# Altium PCB Main_Board.PcbDoc (part 2 of 14)
Units mm, origin at the board's own origin, x right, y up, seen from the top; angles counter-clockwise.
Board outline 142 x 82 mm, 10 copper layers (L1_Top, L2_PWR1, L3_Sig1, L4_GND1, L5_Sig2, L6_Sig3, L7_GND2, L8_Sig4, L9_GND3, L8_Bottom), stack 1.71 mm thick; 299 components, 328 nets, 2329 pads, 2908 vias.
Unrouted connection lines stored in the file: 2.
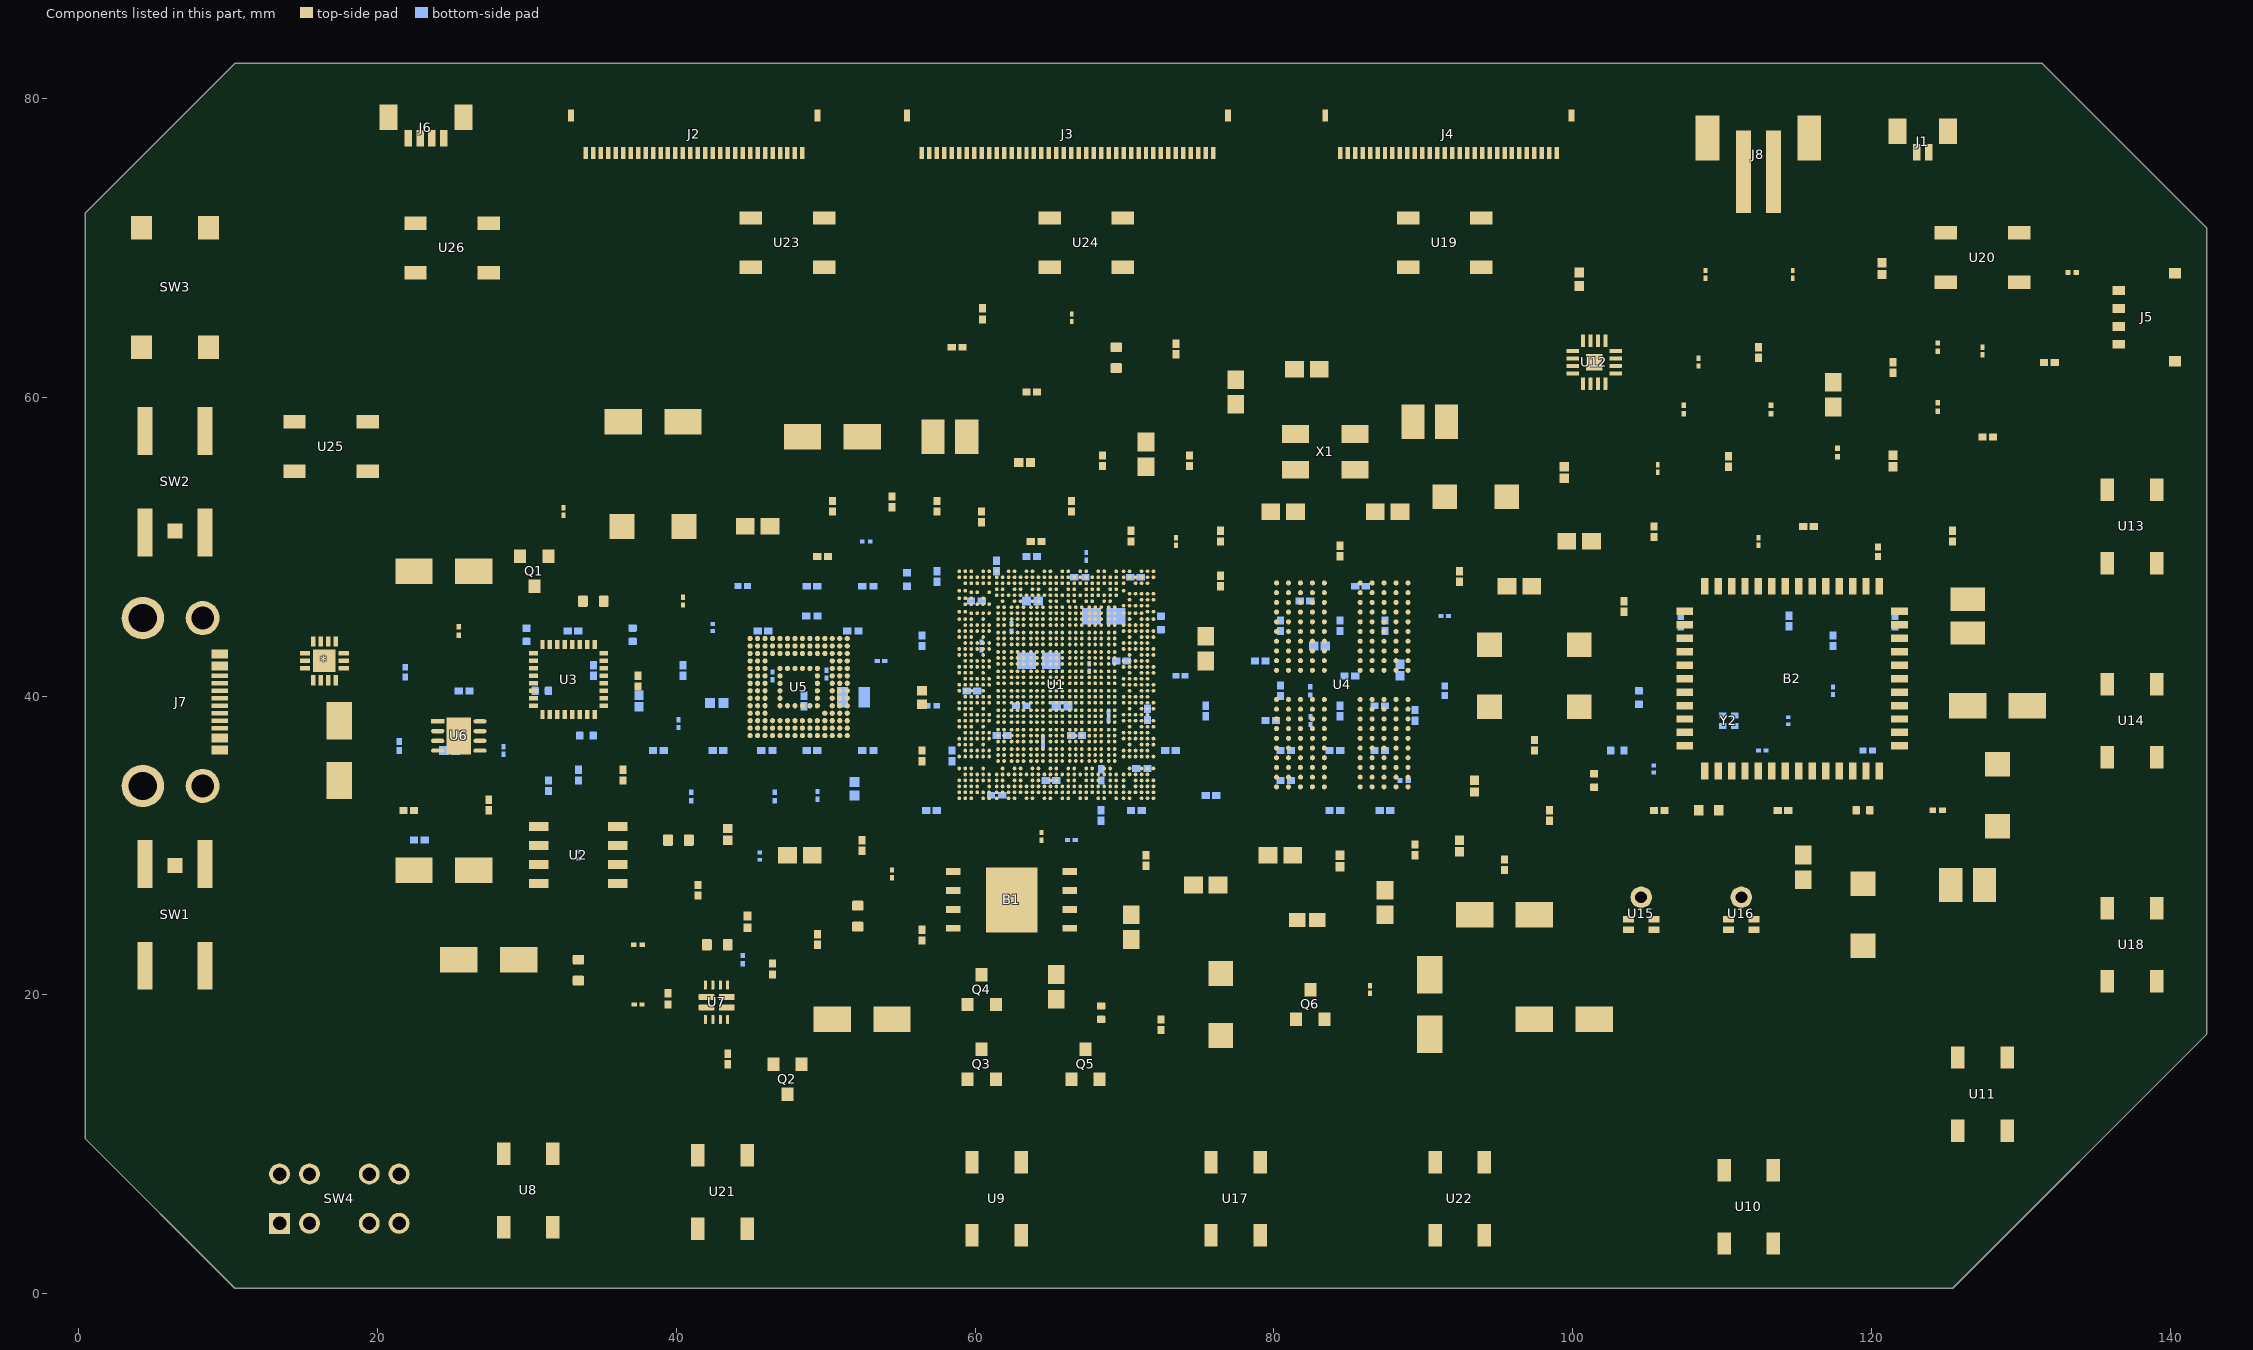
[diagram p10: the components of this part, seen from the top]

## Design rules (kind name [scope] priority, off if disabled: settings) (continued)
Clearance Clearance_1 [InNetClass('MIPI_HIGH_SPEED') And (ExistsOnLayer('L3_Sig1') Or ExistsOnLayer('L5_Sig2') Or ExistsOnLayer('L6_Sig3') Or ExistsOnLayer('L8_Sig4')) vs InNetClass('MCU_SIGNAL') And (ExistsOnLayer('L3_Sig1') Or ExistsOnLayer('L5_Sig2') Or ExistsOnLayer('L6_Sig3') Or ExistsOnLayer('L8_Sig4'))] p128: gap=0.02 ignorepadtopadclearanceinfootprint=FALSE except(0.254: Hole-Hole) sourcerule=512 cellrowname=MIPI_HIGH_SPEED cellrowtype=2 cellcolname=MCU_SIGNAL cellcoltype=2 innerlayers=TRUE
Clearance Clearance_2 [InNetClass('MIPI_HIGH_SPEED') And (ExistsOnLayer('L1_Top') Or ExistsOnLayer('L8_Bottom')) vs InNetClass('MCU_SIGNAL') And (ExistsOnLayer('L1_Top') Or ExistsOnLayer('L8_Bottom'))] p129: gap=0.02 ignorepadtopadclearanceinfootprint=FALSE except(0.254: Hole-Hole) sourcerule=512 cellrowname=MIPI_HIGH_SPEED cellrowtype=2 cellcolname=MCU_SIGNAL cellcoltype=2 outerlayers=TRUE
Clearance Clearance_3 [InNetClass('MIPI_HIGH_SPEED') vs InNetClass('MCU_SIGNAL')] p130: gap=0.254 ignorepadtopadclearanceinfootprint=FALSE sourcerule=512 cellrowname=MIPI_HIGH_SPEED cellrowtype=2 cellcolname=MCU_SIGNAL cellcoltype=2
Clearance Clearance_1 [InNetClass('MIPI_HIGH_SPEED') And (ExistsOnLayer('L3_Sig1') Or ExistsOnLayer('L5_Sig2') Or ExistsOnLayer('L6_Sig3') Or ExistsOnLayer('L8_Sig4')) vs InNetClass('MIPI_HIGH_SPEED') And (ExistsOnLayer('L3_Sig1') Or ExistsOnLayer('L5_Sig2') Or ExistsOnLayer('L6_Sig3') Or ExistsOnLayer('L8_Sig4'))] p131: gap=0.02 ignorepadtopadclearanceinfootprint=FALSE except(0.254: Hole-Hole) sourcerule=512 cellrowname=MIPI_HIGH_SPEED cellrowtype=2 cellcolname=MIPI_HIGH_SPEED cellcoltype=2 innerlayers=TRUE
Clearance Clearance_2 [InNetClass('MIPI_HIGH_SPEED') And (ExistsOnLayer('L1_Top') Or ExistsOnLayer('L8_Bottom')) vs InNetClass('MIPI_HIGH_SPEED') And (ExistsOnLayer('L1_Top') Or ExistsOnLayer('L8_Bottom'))] p132: gap=0.02 ignorepadtopadclearanceinfootprint=FALSE except(0.254: Hole-Hole) sourcerule=512 cellrowname=MIPI_HIGH_SPEED cellrowtype=2 cellcolname=MIPI_HIGH_SPEED cellcoltype=2 outerlayers=TRUE
Clearance Clearance_3 [InNetClass('MIPI_HIGH_SPEED') vs InNetClass('MIPI_HIGH_SPEED')] p133: gap=0.254 ignorepadtopadclearanceinfootprint=FALSE sourcerule=512 cellrowname=MIPI_HIGH_SPEED cellrowtype=2 cellcolname=MIPI_HIGH_SPEED cellcoltype=2
Clearance Clearance_1 [InNetClass('PERIPHERICS_SIGNALS') And (ExistsOnLayer('L3_Sig1') Or ExistsOnLayer('L5_Sig2') Or ExistsOnLayer('L6_Sig3') Or ExistsOnLayer('L8_Sig4')) vs InNetClass('ANTENAS') And (ExistsOnLayer('L3_Sig1') Or ExistsOnLayer('L5_Sig2') Or ExistsOnLayer('L6_Sig3') Or ExistsOnLayer('L8_Sig4'))] p134: gap=0.02 ignorepadtopadclearanceinfootprint=FALSE except(0.05: Hole-Hole) sourcerule=512 cellrowname=PERIPHERICS_SIGNALS cellrowtype=2 cellcolname=ANTENAS cellcoltype=2 innerlayers=TRUE
Clearance Clearance_2 [InNetClass('PERIPHERICS_SIGNALS') And (ExistsOnLayer('L1_Top') Or ExistsOnLayer('L8_Bottom')) vs InNetClass('ANTENAS') And (ExistsOnLayer('L1_Top') Or ExistsOnLayer('L8_Bottom'))] p135: gap=0.02 ignorepadtopadclearanceinfootprint=FALSE except(0.05: Hole-Hole) sourcerule=512 cellrowname=PERIPHERICS_SIGNALS cellrowtype=2 cellcolname=ANTENAS cellcoltype=2 outerlayers=TRUE
Clearance Clearance_3 [InNetClass('PERIPHERICS_SIGNALS') vs InNetClass('ANTENAS')] p136: gap=0.254 ignorepadtopadclearanceinfootprint=FALSE sourcerule=512 cellrowname=PERIPHERICS_SIGNALS cellrowtype=2 cellcolname=ANTENAS cellcoltype=2
Clearance Clearance_1 [InNetClass('PERIPHERICS_SIGNALS') And (ExistsOnLayer('L3_Sig1') Or ExistsOnLayer('L5_Sig2') Or ExistsOnLayer('L6_Sig3') Or ExistsOnLayer('L8_Sig4')) vs (ExistsOnLayer('L3_Sig1') Or ExistsOnLayer('L5_Sig2') Or ExistsOnLayer('L6_Sig3') Or ExistsOnLayer('L8_Sig4'))] p137: gap=0.02 ignorepadtopadclearanceinfootprint=FALSE except(0.254: Hole-Hole) sourcerule=512 cellrowname=PERIPHERICS_SIGNALS cellrowtype=2 cellcolname=All cellcoltype=0 innerlayers=TRUE
Clearance Clearance_2 [InNetClass('PERIPHERICS_SIGNALS') And (ExistsOnLayer('L1_Top') Or ExistsOnLayer('L8_Bottom')) vs (ExistsOnLayer('L1_Top') Or ExistsOnLayer('L8_Bottom'))] p138: gap=0.02 ignorepadtopadclearanceinfootprint=FALSE except(0.254: Hole-Hole) sourcerule=512 cellrowname=PERIPHERICS_SIGNALS cellrowtype=2 cellcolname=All cellcoltype=0 outerlayers=TRUE
Clearance Clearance_3 [InNetClass('PERIPHERICS_SIGNALS')] p139: gap=0.254 ignorepadtopadclearanceinfootprint=FALSE sourcerule=512 cellrowname=PERIPHERICS_SIGNALS cellrowtype=2 cellcolname=All cellcoltype=0
Clearance Clearance_1 [InNetClass('PERIPHERICS_SIGNALS') And (ExistsOnLayer('L3_Sig1') Or ExistsOnLayer('L5_Sig2') Or ExistsOnLayer('L6_Sig3') Or ExistsOnLayer('L8_Sig4')) vs InNetClass('CPU_SIGNAL') And (ExistsOnLayer('L3_Sig1') Or ExistsOnLayer('L5_Sig2') Or ExistsOnLayer('L6_Sig3') Or ExistsOnLayer('L8_Sig4'))] p140: gap=0.02 ignorepadtopadclearanceinfootprint=FALSE except(0.254: Hole-Hole) sourcerule=512 cellrowname=PERIPHERICS_SIGNALS cellrowtype=2 cellcolname=CPU_SIGNAL cellcoltype=2 innerlayers=TRUE
Clearance Clearance_2 [InNetClass('PERIPHERICS_SIGNALS') And (ExistsOnLayer('L1_Top') Or ExistsOnLayer('L8_Bottom')) vs InNetClass('CPU_SIGNAL') And (ExistsOnLayer('L1_Top') Or ExistsOnLayer('L8_Bottom'))] p141: gap=0.02 ignorepadtopadclearanceinfootprint=FALSE except(0.254: Hole-Hole) sourcerule=512 cellrowname=PERIPHERICS_SIGNALS cellrowtype=2 cellcolname=CPU_SIGNAL cellcoltype=2 outerlayers=TRUE
Clearance Clearance_3 [InNetClass('PERIPHERICS_SIGNALS') vs InNetClass('CPU_SIGNAL')] p142: gap=0.254 ignorepadtopadclearanceinfootprint=FALSE sourcerule=512 cellrowname=PERIPHERICS_SIGNALS cellrowtype=2 cellcolname=CPU_SIGNAL cellcoltype=2
Clearance Clearance_1 [InNetClass('PERIPHERICS_SIGNALS') And (ExistsOnLayer('L3_Sig1') Or ExistsOnLayer('L5_Sig2') Or ExistsOnLayer('L6_Sig3') Or ExistsOnLayer('L8_Sig4')) vs InNetClass('CSI_HIGH_SPEED') And (ExistsOnLayer('L3_Sig1') Or ExistsOnLayer('L5_Sig2') Or ExistsOnLayer('L6_Sig3') Or ExistsOnLayer('L8_Sig4'))] p143: gap=0.02 ignorepadtopadclearanceinfootprint=FALSE except(0.254: Hole-Hole) sourcerule=512 cellrowname=PERIPHERICS_SIGNALS cellrowtype=2 cellcolname=CSI_HIGH_SPEED cellcoltype=2 innerlayers=TRUE
Clearance Clearance_2 [InNetClass('PERIPHERICS_SIGNALS') And (ExistsOnLayer('L1_Top') Or ExistsOnLayer('L8_Bottom')) vs InNetClass('CSI_HIGH_SPEED') And (ExistsOnLayer('L1_Top') Or ExistsOnLayer('L8_Bottom'))] p144: gap=0.02 ignorepadtopadclearanceinfootprint=FALSE except(0.254: Hole-Hole) sourcerule=512 cellrowname=PERIPHERICS_SIGNALS cellrowtype=2 cellcolname=CSI_HIGH_SPEED cellcoltype=2 outerlayers=TRUE
Clearance Clearance_3 [InNetClass('PERIPHERICS_SIGNALS') vs InNetClass('CSI_HIGH_SPEED')] p145: gap=0.254 ignorepadtopadclearanceinfootprint=FALSE sourcerule=512 cellrowname=PERIPHERICS_SIGNALS cellrowtype=2 cellcolname=CSI_HIGH_SPEED cellcoltype=2
Clearance Clearance_1 [InNetClass('PERIPHERICS_SIGNALS') And (ExistsOnLayer('L3_Sig1') Or ExistsOnLayer('L5_Sig2') Or ExistsOnLayer('L6_Sig3') Or ExistsOnLayer('L8_Sig4')) vs InNetClass('DDR1_HIGH_SPEED') And (ExistsOnLayer('L3_Sig1') Or ExistsOnLayer('L5_Sig2') Or ExistsOnLayer('L6_Sig3') Or ExistsOnLayer('L8_Sig4'))] p146: gap=0.02 ignorepadtopadclearanceinfootprint=FALSE except(0.089: Hole-Hole) sourcerule=512 cellrowname=PERIPHERICS_SIGNALS cellrowtype=2 cellcolname=DDR1_HIGH_SPEED cellcoltype=2 innerlayers=TRUE
Clearance Clearance_2 [InNetClass('PERIPHERICS_SIGNALS') And (ExistsOnLayer('L1_Top') Or ExistsOnLayer('L8_Bottom')) vs InNetClass('DDR1_HIGH_SPEED') And (ExistsOnLayer('L1_Top') Or ExistsOnLayer('L8_Bottom'))] p147: gap=0.02 ignorepadtopadclearanceinfootprint=FALSE except(0.089: Hole-Hole) sourcerule=512 cellrowname=PERIPHERICS_SIGNALS cellrowtype=2 cellcolname=DDR1_HIGH_SPEED cellcoltype=2 outerlayers=TRUE
Clearance Clearance_3 [InNetClass('PERIPHERICS_SIGNALS') vs InNetClass('DDR1_HIGH_SPEED')] p148: gap=0.254 ignorepadtopadclearanceinfootprint=FALSE sourcerule=512 cellrowname=PERIPHERICS_SIGNALS cellrowtype=2 cellcolname=DDR1_HIGH_SPEED cellcoltype=2
Clearance Clearance_1 [InNetClass('PERIPHERICS_SIGNALS') And (ExistsOnLayer('L3_Sig1') Or ExistsOnLayer('L5_Sig2') Or ExistsOnLayer('L6_Sig3') Or ExistsOnLayer('L8_Sig4')) vs InNetClass('EMMC_HIGH_SPEED') And (ExistsOnLayer('L3_Sig1') Or ExistsOnLayer('L5_Sig2') Or ExistsOnLayer('L6_Sig3') Or ExistsOnLayer('L8_Sig4'))] p149: gap=0.02 ignorepadtopadclearanceinfootprint=FALSE except(0.254: Hole-Hole) sourcerule=512 cellrowname=PERIPHERICS_SIGNALS cellrowtype=2 cellcolname=EMMC_HIGH_SPEED cellcoltype=2 innerlayers=TRUE
Clearance Clearance_2 [InNetClass('PERIPHERICS_SIGNALS') And (ExistsOnLayer('L1_Top') Or ExistsOnLayer('L8_Bottom')) vs InNetClass('EMMC_HIGH_SPEED') And (ExistsOnLayer('L1_Top') Or ExistsOnLayer('L8_Bottom'))] p150: gap=0.02 ignorepadtopadclearanceinfootprint=FALSE except(0.254: Hole-Hole) sourcerule=512 cellrowname=PERIPHERICS_SIGNALS cellrowtype=2 cellcolname=EMMC_HIGH_SPEED cellcoltype=2 outerlayers=TRUE
Clearance Clearance_3 [InNetClass('PERIPHERICS_SIGNALS') vs InNetClass('EMMC_HIGH_SPEED')] p151: gap=0.254 ignorepadtopadclearanceinfootprint=FALSE sourcerule=512 cellrowname=PERIPHERICS_SIGNALS cellrowtype=2 cellcolname=EMMC_HIGH_SPEED cellcoltype=2
Clearance Clearance_1 [InNetClass('PERIPHERICS_SIGNALS') And (ExistsOnLayer('L3_Sig1') Or ExistsOnLayer('L5_Sig2') Or ExistsOnLayer('L6_Sig3') Or ExistsOnLayer('L8_Sig4')) vs InNetClass('I2S_PROTOCOL') And (ExistsOnLayer('L3_Sig1') Or ExistsOnLayer('L5_Sig2') Or ExistsOnLayer('L6_Sig3') Or ExistsOnLayer('L8_Sig4'))] p152: gap=0.02 ignorepadtopadclearanceinfootprint=FALSE except(0.254: Hole-Hole) sourcerule=512 cellrowname=PERIPHERICS_SIGNALS cellrowtype=2 cellcolname=I2S_PROTOCOL cellcoltype=2 innerlayers=TRUE
Clearance Clearance_2 [InNetClass('PERIPHERICS_SIGNALS') And (ExistsOnLayer('L1_Top') Or ExistsOnLayer('L8_Bottom')) vs InNetClass('I2S_PROTOCOL') And (ExistsOnLayer('L1_Top') Or ExistsOnLayer('L8_Bottom'))] p153: gap=0.02 ignorepadtopadclearanceinfootprint=FALSE except(0.254: Hole-Hole) sourcerule=512 cellrowname=PERIPHERICS_SIGNALS cellrowtype=2 cellcolname=I2S_PROTOCOL cellcoltype=2 outerlayers=TRUE
Clearance Clearance_3 [InNetClass('PERIPHERICS_SIGNALS') vs InNetClass('I2S_PROTOCOL')] p154: gap=0.254 ignorepadtopadclearanceinfootprint=FALSE sourcerule=512 cellrowname=PERIPHERICS_SIGNALS cellrowtype=2 cellcolname=I2S_PROTOCOL cellcoltype=2
Clearance Clearance_1 [InNetClass('PERIPHERICS_SIGNALS') And (ExistsOnLayer('L3_Sig1') Or ExistsOnLayer('L5_Sig2') Or ExistsOnLayer('L6_Sig3') Or ExistsOnLayer('L8_Sig4')) vs InNetClass('MCU_SIGNAL') And (ExistsOnLayer('L3_Sig1') Or ExistsOnLayer('L5_Sig2') Or ExistsOnLayer('L6_Sig3') Or ExistsOnLayer('L8_Sig4'))] p155: gap=0.02 ignorepadtopadclearanceinfootprint=FALSE except(0.254: Hole-Hole) sourcerule=512 cellrowname=PERIPHERICS_SIGNALS cellrowtype=2 cellcolname=MCU_SIGNAL cellcoltype=2 innerlayers=TRUE
Clearance Clearance_2 [InNetClass('PERIPHERICS_SIGNALS') And (ExistsOnLayer('L1_Top') Or ExistsOnLayer('L8_Bottom')) vs InNetClass('MCU_SIGNAL') And (ExistsOnLayer('L1_Top') Or ExistsOnLayer('L8_Bottom'))] p156: gap=0.02 ignorepadtopadclearanceinfootprint=FALSE except(0.254: Hole-Hole) sourcerule=512 cellrowname=PERIPHERICS_SIGNALS cellrowtype=2 cellcolname=MCU_SIGNAL cellcoltype=2 outerlayers=TRUE
Clearance Clearance_3 [InNetClass('PERIPHERICS_SIGNALS') vs InNetClass('MCU_SIGNAL')] p157: gap=0.254 ignorepadtopadclearanceinfootprint=FALSE sourcerule=512 cellrowname=PERIPHERICS_SIGNALS cellrowtype=2 cellcolname=MCU_SIGNAL cellcoltype=2
Clearance Clearance_1 [InNetClass('PERIPHERICS_SIGNALS') And (ExistsOnLayer('L3_Sig1') Or ExistsOnLayer('L5_Sig2') Or ExistsOnLayer('L6_Sig3') Or ExistsOnLayer('L8_Sig4')) vs InNetClass('MIPI_HIGH_SPEED') And (ExistsOnLayer('L3_Sig1') Or ExistsOnLayer('L5_Sig2') Or ExistsOnLayer('L6_Sig3') Or ExistsOnLayer('L8_Sig4'))] p158: gap=0.02 ignorepadtopadclearanceinfootprint=FALSE except(0.254: Hole-Hole) sourcerule=512 cellrowname=PERIPHERICS_SIGNALS cellrowtype=2 cellcolname=MIPI_HIGH_SPEED cellcoltype=2 innerlayers=TRUE
Clearance Clearance_2 [InNetClass('PERIPHERICS_SIGNALS') And (ExistsOnLayer('L1_Top') Or ExistsOnLayer('L8_Bottom')) vs InNetClass('MIPI_HIGH_SPEED') And (ExistsOnLayer('L1_Top') Or ExistsOnLayer('L8_Bottom'))] p159: gap=0.02 ignorepadtopadclearanceinfootprint=FALSE except(0.254: Hole-Hole) sourcerule=512 cellrowname=PERIPHERICS_SIGNALS cellrowtype=2 cellcolname=MIPI_HIGH_SPEED cellcoltype=2 outerlayers=TRUE
Clearance Clearance_3 [InNetClass('PERIPHERICS_SIGNALS') vs InNetClass('MIPI_HIGH_SPEED')] p160: gap=0.254 ignorepadtopadclearanceinfootprint=FALSE sourcerule=512 cellrowname=PERIPHERICS_SIGNALS cellrowtype=2 cellcolname=MIPI_HIGH_SPEED cellcoltype=2
Clearance Clearance_1 [InNetClass('PERIPHERICS_SIGNALS') And (ExistsOnLayer('L3_Sig1') Or ExistsOnLayer('L5_Sig2') Or ExistsOnLayer('L6_Sig3') Or ExistsOnLayer('L8_Sig4')) vs InNetClass('PERIPHERICS_SIGNALS') And (ExistsOnLayer('L3_Sig1') Or ExistsOnLayer('L5_Sig2') Or ExistsOnLayer('L6_Sig3') Or ExistsOnLayer('L8_Sig4'))] p161: gap=0.02 ignorepadtopadclearanceinfootprint=FALSE except(0.254: Hole-Hole) sourcerule=512 cellrowname=PERIPHERICS_SIGNALS cellrowtype=2 cellcolname=PERIPHERICS_SIGNALS cellcoltype=2 innerlayers=TRUE
Clearance Clearance_2 [InNetClass('PERIPHERICS_SIGNALS') And (ExistsOnLayer('L1_Top') Or ExistsOnLayer('L8_Bottom')) vs InNetClass('PERIPHERICS_SIGNALS') And (ExistsOnLayer('L1_Top') Or ExistsOnLayer('L8_Bottom'))] p162: gap=0.02 ignorepadtopadclearanceinfootprint=FALSE except(0.254: Hole-Hole) sourcerule=512 cellrowname=PERIPHERICS_SIGNALS cellrowtype=2 cellcolname=PERIPHERICS_SIGNALS cellcoltype=2 outerlayers=TRUE
Clearance Clearance_3 [InNetClass('PERIPHERICS_SIGNALS') vs InNetClass('PERIPHERICS_SIGNALS')] p163: gap=0.254 ignorepadtopadclearanceinfootprint=FALSE sourcerule=512 cellrowname=PERIPHERICS_SIGNALS cellrowtype=2 cellcolname=PERIPHERICS_SIGNALS cellcoltype=2
Clearance Clearance_1 [InNetClass('POWER_SIGNALS') And (ExistsOnLayer('L3_Sig1') Or ExistsOnLayer('L5_Sig2') Or ExistsOnLayer('L6_Sig3') Or ExistsOnLayer('L8_Sig4')) vs InNetClass('ANTENAS') And (ExistsOnLayer('L3_Sig1') Or ExistsOnLayer('L5_Sig2') Or ExistsOnLayer('L6_Sig3') Or ExistsOnLayer('L8_Sig4'))] p164: gap=0.02 ignorepadtopadclearanceinfootprint=FALSE except(0.05: Hole-Hole) sourcerule=512 cellrowname=POWER_SIGNALS cellrowtype=2 cellcolname=ANTENAS cellcoltype=2 innerlayers=TRUE
Clearance Clearance_2 [InNetClass('POWER_SIGNALS') And (ExistsOnLayer('L1_Top') Or ExistsOnLayer('L8_Bottom')) vs InNetClass('ANTENAS') And (ExistsOnLayer('L1_Top') Or ExistsOnLayer('L8_Bottom'))] p165: gap=0.02 ignorepadtopadclearanceinfootprint=FALSE except(0.05: Hole-Hole) sourcerule=512 cellrowname=POWER_SIGNALS cellrowtype=2 cellcolname=ANTENAS cellcoltype=2 outerlayers=TRUE
Clearance Clearance_3 [InNetClass('POWER_SIGNALS') vs InNetClass('ANTENAS')] p166: gap=0.254 ignorepadtopadclearanceinfootprint=FALSE sourcerule=512 cellrowname=POWER_SIGNALS cellrowtype=2 cellcolname=ANTENAS cellcoltype=2
Clearance Clearance_1 [InNetClass('POWER_SIGNALS') And (ExistsOnLayer('L3_Sig1') Or ExistsOnLayer('L5_Sig2') Or ExistsOnLayer('L6_Sig3') Or ExistsOnLayer('L8_Sig4')) vs (ExistsOnLayer('L3_Sig1') Or ExistsOnLayer('L5_Sig2') Or ExistsOnLayer('L6_Sig3') Or ExistsOnLayer('L8_Sig4'))] p167: gap=0.02 ignorepadtopadclearanceinfootprint=FALSE except(0.254: Hole-Hole) sourcerule=512 cellrowname=POWER_SIGNALS cellrowtype=2 cellcolname=All cellcoltype=0 innerlayers=TRUE
Clearance Clearance_2 [InNetClass('POWER_SIGNALS') And (ExistsOnLayer('L1_Top') Or ExistsOnLayer('L8_Bottom')) vs (ExistsOnLayer('L1_Top') Or ExistsOnLayer('L8_Bottom'))] p168: gap=0.02 ignorepadtopadclearanceinfootprint=FALSE except(0.254: Hole-Hole) sourcerule=512 cellrowname=POWER_SIGNALS cellrowtype=2 cellcolname=All cellcoltype=0 outerlayers=TRUE
Clearance Clearance_3 [InNetClass('POWER_SIGNALS')] p169: gap=0.254 ignorepadtopadclearanceinfootprint=FALSE sourcerule=512 cellrowname=POWER_SIGNALS cellrowtype=2 cellcolname=All cellcoltype=0
Clearance Clearance_1 [InNetClass('POWER_SIGNALS') And (ExistsOnLayer('L3_Sig1') Or ExistsOnLayer('L5_Sig2') Or ExistsOnLayer('L6_Sig3') Or ExistsOnLayer('L8_Sig4')) vs InNetClass('CPU_SIGNAL') And (ExistsOnLayer('L3_Sig1') Or ExistsOnLayer('L5_Sig2') Or ExistsOnLayer('L6_Sig3') Or ExistsOnLayer('L8_Sig4'))] p170: gap=0.02 ignorepadtopadclearanceinfootprint=FALSE except(0.254: Hole-Hole) sourcerule=512 cellrowname=POWER_SIGNALS cellrowtype=2 cellcolname=CPU_SIGNAL cellcoltype=2 innerlayers=TRUE
Clearance Clearance_2 [InNetClass('POWER_SIGNALS') And (ExistsOnLayer('L1_Top') Or ExistsOnLayer('L8_Bottom')) vs InNetClass('CPU_SIGNAL') And (ExistsOnLayer('L1_Top') Or ExistsOnLayer('L8_Bottom'))] p171: gap=0.02 ignorepadtopadclearanceinfootprint=FALSE except(0.254: Hole-Hole) sourcerule=512 cellrowname=POWER_SIGNALS cellrowtype=2 cellcolname=CPU_SIGNAL cellcoltype=2 outerlayers=TRUE
Clearance Clearance_3 [InNetClass('POWER_SIGNALS') vs InNetClass('CPU_SIGNAL')] p172: gap=0.254 ignorepadtopadclearanceinfootprint=FALSE sourcerule=512 cellrowname=POWER_SIGNALS cellrowtype=2 cellcolname=CPU_SIGNAL cellcoltype=2
Clearance Clearance_1 [InNetClass('POWER_SIGNALS') And (ExistsOnLayer('L3_Sig1') Or ExistsOnLayer('L5_Sig2') Or ExistsOnLayer('L6_Sig3') Or ExistsOnLayer('L8_Sig4')) vs InNetClass('CSI_HIGH_SPEED') And (ExistsOnLayer('L3_Sig1') Or ExistsOnLayer('L5_Sig2') Or ExistsOnLayer('L6_Sig3') Or ExistsOnLayer('L8_Sig4'))] p173: gap=0.02 ignorepadtopadclearanceinfootprint=FALSE except(0.254: Hole-Hole) sourcerule=512 cellrowname=POWER_SIGNALS cellrowtype=2 cellcolname=CSI_HIGH_SPEED cellcoltype=2 innerlayers=TRUE
Clearance Clearance_2 [InNetClass('POWER_SIGNALS') And (ExistsOnLayer('L1_Top') Or ExistsOnLayer('L8_Bottom')) vs InNetClass('CSI_HIGH_SPEED') And (ExistsOnLayer('L1_Top') Or ExistsOnLayer('L8_Bottom'))] p174: gap=0.02 ignorepadtopadclearanceinfootprint=FALSE except(0.254: Hole-Hole) sourcerule=512 cellrowname=POWER_SIGNALS cellrowtype=2 cellcolname=CSI_HIGH_SPEED cellcoltype=2 outerlayers=TRUE
Clearance Clearance_3 [InNetClass('POWER_SIGNALS') vs InNetClass('CSI_HIGH_SPEED')] p175: gap=0.254 ignorepadtopadclearanceinfootprint=FALSE sourcerule=512 cellrowname=POWER_SIGNALS cellrowtype=2 cellcolname=CSI_HIGH_SPEED cellcoltype=2
Clearance Clearance_1 [InNetClass('POWER_SIGNALS') And (ExistsOnLayer('L3_Sig1') Or ExistsOnLayer('L5_Sig2') Or ExistsOnLayer('L6_Sig3') Or ExistsOnLayer('L8_Sig4')) vs InNetClass('DDR1_HIGH_SPEED') And (ExistsOnLayer('L3_Sig1') Or ExistsOnLayer('L5_Sig2') Or ExistsOnLayer('L6_Sig3') Or ExistsOnLayer('L8_Sig4'))] p176: gap=0.02 ignorepadtopadclearanceinfootprint=FALSE except(0.089: Hole-Hole) sourcerule=512 cellrowname=POWER_SIGNALS cellrowtype=2 cellcolname=DDR1_HIGH_SPEED cellcoltype=2 innerlayers=TRUE
Clearance Clearance_2 [InNetClass('POWER_SIGNALS') And (ExistsOnLayer('L1_Top') Or ExistsOnLayer('L8_Bottom')) vs InNetClass('DDR1_HIGH_SPEED') And (ExistsOnLayer('L1_Top') Or ExistsOnLayer('L8_Bottom'))] p177: gap=0.02 ignorepadtopadclearanceinfootprint=FALSE except(0.089: Hole-Hole) sourcerule=512 cellrowname=POWER_SIGNALS cellrowtype=2 cellcolname=DDR1_HIGH_SPEED cellcoltype=2 outerlayers=TRUE
Clearance Clearance_3 [InNetClass('POWER_SIGNALS') vs InNetClass('DDR1_HIGH_SPEED')] p178: gap=0.254 ignorepadtopadclearanceinfootprint=FALSE sourcerule=512 cellrowname=POWER_SIGNALS cellrowtype=2 cellcolname=DDR1_HIGH_SPEED cellcoltype=2
Clearance Clearance_1 [InNetClass('POWER_SIGNALS') And (ExistsOnLayer('L3_Sig1') Or ExistsOnLayer('L5_Sig2') Or ExistsOnLayer('L6_Sig3') Or ExistsOnLayer('L8_Sig4')) vs InNetClass('EMMC_HIGH_SPEED') And (ExistsOnLayer('L3_Sig1') Or ExistsOnLayer('L5_Sig2') Or ExistsOnLayer('L6_Sig3') Or ExistsOnLayer('L8_Sig4'))] p179: gap=0.02 ignorepadtopadclearanceinfootprint=FALSE except(0.254: Hole-Hole) sourcerule=512 cellrowname=POWER_SIGNALS cellrowtype=2 cellcolname=EMMC_HIGH_SPEED cellcoltype=2 innerlayers=TRUE
Clearance Clearance_2 [InNetClass('POWER_SIGNALS') And (ExistsOnLayer('L1_Top') Or ExistsOnLayer('L8_Bottom')) vs InNetClass('EMMC_HIGH_SPEED') And (ExistsOnLayer('L1_Top') Or ExistsOnLayer('L8_Bottom'))] p180: gap=0.02 ignorepadtopadclearanceinfootprint=FALSE except(0.254: Hole-Hole) sourcerule=512 cellrowname=POWER_SIGNALS cellrowtype=2 cellcolname=EMMC_HIGH_SPEED cellcoltype=2 outerlayers=TRUE
Clearance Clearance_3 [InNetClass('POWER_SIGNALS') vs InNetClass('EMMC_HIGH_SPEED')] p181: gap=0.254 ignorepadtopadclearanceinfootprint=FALSE sourcerule=512 cellrowname=POWER_SIGNALS cellrowtype=2 cellcolname=EMMC_HIGH_SPEED cellcoltype=2
Clearance Clearance_1 [InNetClass('POWER_SIGNALS') And (ExistsOnLayer('L3_Sig1') Or ExistsOnLayer('L5_Sig2') Or ExistsOnLayer('L6_Sig3') Or ExistsOnLayer('L8_Sig4')) vs InNetClass('I2S_PROTOCOL') And (ExistsOnLayer('L3_Sig1') Or ExistsOnLayer('L5_Sig2') Or ExistsOnLayer('L6_Sig3') Or ExistsOnLayer('L8_Sig4'))] p182: gap=0.02 ignorepadtopadclearanceinfootprint=FALSE except(0.254: Hole-Hole) sourcerule=512 cellrowname=POWER_SIGNALS cellrowtype=2 cellcolname=I2S_PROTOCOL cellcoltype=2 innerlayers=TRUE
Clearance Clearance_2 [InNetClass('POWER_SIGNALS') And (ExistsOnLayer('L1_Top') Or ExistsOnLayer('L8_Bottom')) vs InNetClass('I2S_PROTOCOL') And (ExistsOnLayer('L1_Top') Or ExistsOnLayer('L8_Bottom'))] p183: gap=0.02 ignorepadtopadclearanceinfootprint=FALSE except(0.254: Hole-Hole) sourcerule=512 cellrowname=POWER_SIGNALS cellrowtype=2 cellcolname=I2S_PROTOCOL cellcoltype=2 outerlayers=TRUE
Clearance Clearance_3 [InNetClass('POWER_SIGNALS') vs InNetClass('I2S_PROTOCOL')] p184: gap=0.254 ignorepadtopadclearanceinfootprint=FALSE sourcerule=512 cellrowname=POWER_SIGNALS cellrowtype=2 cellcolname=I2S_PROTOCOL cellcoltype=2
Clearance Clearance_1 [InNetClass('POWER_SIGNALS') And (ExistsOnLayer('L3_Sig1') Or ExistsOnLayer('L5_Sig2') Or ExistsOnLayer('L6_Sig3') Or ExistsOnLayer('L8_Sig4')) vs InNetClass('MCU_SIGNAL') And (ExistsOnLayer('L3_Sig1') Or ExistsOnLayer('L5_Sig2') Or ExistsOnLayer('L6_Sig3') Or ExistsOnLayer('L8_Sig4'))] p185: gap=0.02 ignorepadtopadclearanceinfootprint=FALSE except(0.254: Hole-Hole) sourcerule=512 cellrowname=POWER_SIGNALS cellrowtype=2 cellcolname=MCU_SIGNAL cellcoltype=2 innerlayers=TRUE
Clearance Clearance_2 [InNetClass('POWER_SIGNALS') And (ExistsOnLayer('L1_Top') Or ExistsOnLayer('L8_Bottom')) vs InNetClass('MCU_SIGNAL') And (ExistsOnLayer('L1_Top') Or ExistsOnLayer('L8_Bottom'))] p186: gap=0.02 ignorepadtopadclearanceinfootprint=FALSE except(0.254: Hole-Hole) sourcerule=512 cellrowname=POWER_SIGNALS cellrowtype=2 cellcolname=MCU_SIGNAL cellcoltype=2 outerlayers=TRUE
Clearance Clearance_3 [InNetClass('POWER_SIGNALS') vs InNetClass('MCU_SIGNAL')] p187: gap=0.254 ignorepadtopadclearanceinfootprint=FALSE sourcerule=512 cellrowname=POWER_SIGNALS cellrowtype=2 cellcolname=MCU_SIGNAL cellcoltype=2
Clearance Clearance_1 [InNetClass('POWER_SIGNALS') And (ExistsOnLayer('L3_Sig1') Or ExistsOnLayer('L5_Sig2') Or ExistsOnLayer('L6_Sig3') Or ExistsOnLayer('L8_Sig4')) vs InNetClass('MIPI_HIGH_SPEED') And (ExistsOnLayer('L3_Sig1') Or ExistsOnLayer('L5_Sig2') Or ExistsOnLayer('L6_Sig3') Or ExistsOnLayer('L8_Sig4'))] p188: gap=0.02 ignorepadtopadclearanceinfootprint=FALSE except(0.254: Hole-Hole) sourcerule=512 cellrowname=POWER_SIGNALS cellrowtype=2 cellcolname=MIPI_HIGH_SPEED cellcoltype=2 innerlayers=TRUE
Clearance Clearance_2 [InNetClass('POWER_SIGNALS') And (ExistsOnLayer('L1_Top') Or ExistsOnLayer('L8_Bottom')) vs InNetClass('MIPI_HIGH_SPEED') And (ExistsOnLayer('L1_Top') Or ExistsOnLayer('L8_Bottom'))] p189: gap=0.02 ignorepadtopadclearanceinfootprint=FALSE except(0.254: Hole-Hole) sourcerule=512 cellrowname=POWER_SIGNALS cellrowtype=2 cellcolname=MIPI_HIGH_SPEED cellcoltype=2 outerlayers=TRUE
Clearance Clearance_3 [InNetClass('POWER_SIGNALS') vs InNetClass('MIPI_HIGH_SPEED')] p190: gap=0.254 ignorepadtopadclearanceinfootprint=FALSE sourcerule=512 cellrowname=POWER_SIGNALS cellrowtype=2 cellcolname=MIPI_HIGH_SPEED cellcoltype=2
Clearance Clearance_1 [InNetClass('POWER_SIGNALS') And (ExistsOnLayer('L3_Sig1') Or ExistsOnLayer('L5_Sig2') Or ExistsOnLayer('L6_Sig3') Or ExistsOnLayer('L8_Sig4')) vs InNetClass('PERIPHERICS_SIGNALS') And (ExistsOnLayer('L3_Sig1') Or ExistsOnLayer('L5_Sig2') Or ExistsOnLayer('L6_Sig3') Or ExistsOnLayer('L8_Sig4'))] p191: gap=0.02 ignorepadtopadclearanceinfootprint=FALSE except(0.254: Hole-Hole) sourcerule=512 cellrowname=POWER_SIGNALS cellrowtype=2 cellcolname=PERIPHERICS_SIGNALS cellcoltype=2 innerlayers=TRUE
Clearance Clearance_2 [InNetClass('POWER_SIGNALS') And (ExistsOnLayer('L1_Top') Or ExistsOnLayer('L8_Bottom')) vs InNetClass('PERIPHERICS_SIGNALS') And (ExistsOnLayer('L1_Top') Or ExistsOnLayer('L8_Bottom'))] p192: gap=0.02 ignorepadtopadclearanceinfootprint=FALSE except(0.254: Hole-Hole) sourcerule=512 cellrowname=POWER_SIGNALS cellrowtype=2 cellcolname=PERIPHERICS_SIGNALS cellcoltype=2 outerlayers=TRUE
Clearance Clearance_3 [InNetClass('POWER_SIGNALS') vs InNetClass('PERIPHERICS_SIGNALS')] p193: gap=0.254 ignorepadtopadclearanceinfootprint=FALSE sourcerule=512 cellrowname=POWER_SIGNALS cellrowtype=2 cellcolname=PERIPHERICS_SIGNALS cellcoltype=2
Clearance Clearance_1 [InNetClass('POWER_SIGNALS') And (ExistsOnLayer('L3_Sig1') Or ExistsOnLayer('L5_Sig2') Or ExistsOnLayer('L6_Sig3') Or ExistsOnLayer('L8_Sig4')) vs InNetClass('POWER_SIGNALS') And (ExistsOnLayer('L3_Sig1') Or ExistsOnLayer('L5_Sig2') Or ExistsOnLayer('L6_Sig3') Or ExistsOnLayer('L8_Sig4'))] p194: gap=0.02 ignorepadtopadclearanceinfootprint=FALSE except(0.254: Hole-Hole) sourcerule=512 cellrowname=POWER_SIGNALS cellrowtype=2 cellcolname=POWER_SIGNALS cellcoltype=2 innerlayers=TRUE
Clearance Clearance_2 [InNetClass('POWER_SIGNALS') And (ExistsOnLayer('L1_Top') Or ExistsOnLayer('L8_Bottom')) vs InNetClass('POWER_SIGNALS') And (ExistsOnLayer('L1_Top') Or ExistsOnLayer('L8_Bottom'))] p195: gap=0.02 ignorepadtopadclearanceinfootprint=FALSE except(0.254: Hole-Hole) sourcerule=512 cellrowname=POWER_SIGNALS cellrowtype=2 cellcolname=POWER_SIGNALS cellcoltype=2 outerlayers=TRUE
Clearance Clearance_3 [InNetClass('POWER_SIGNALS') vs InNetClass('POWER_SIGNALS')] p196: gap=0.254 ignorepadtopadclearanceinfootprint=FALSE sourcerule=512 cellrowname=POWER_SIGNALS cellrowtype=2 cellcolname=POWER_SIGNALS cellcoltype=2
Clearance Clearance_1 [InNetClass('POWER_SUPPLY') And (ExistsOnLayer('L3_Sig1') Or ExistsOnLayer('L5_Sig2') Or ExistsOnLayer('L6_Sig3') Or ExistsOnLayer('L8_Sig4')) vs InNetClass('ANTENAS') And (ExistsOnLayer('L3_Sig1') Or ExistsOnLayer('L5_Sig2') Or ExistsOnLayer('L6_Sig3') Or ExistsOnLayer('L8_Sig4'))] p197: gap=0.02 ignorepadtopadclearanceinfootprint=FALSE except(0.05: Hole-Hole) sourcerule=512 cellrowname=POWER_SUPPLY cellrowtype=2 cellcolname=ANTENAS cellcoltype=2 innerlayers=TRUE
Clearance Clearance_2 [InNetClass('POWER_SUPPLY') And (ExistsOnLayer('L1_Top') Or ExistsOnLayer('L8_Bottom')) vs InNetClass('ANTENAS') And (ExistsOnLayer('L1_Top') Or ExistsOnLayer('L8_Bottom'))] p198: gap=0.02 ignorepadtopadclearanceinfootprint=FALSE except(0.05: Hole-Hole) sourcerule=512 cellrowname=POWER_SUPPLY cellrowtype=2 cellcolname=ANTENAS cellcoltype=2 outerlayers=TRUE
Clearance Clearance_3 [InNetClass('POWER_SUPPLY') vs InNetClass('ANTENAS')] p199: gap=0.254 ignorepadtopadclearanceinfootprint=FALSE sourcerule=512 cellrowname=POWER_SUPPLY cellrowtype=2 cellcolname=ANTENAS cellcoltype=2
Clearance Clearance_1 [InNetClass('POWER_SUPPLY') And (ExistsOnLayer('L3_Sig1') Or ExistsOnLayer('L5_Sig2') Or ExistsOnLayer('L6_Sig3') Or ExistsOnLayer('L8_Sig4')) vs (ExistsOnLayer('L3_Sig1') Or ExistsOnLayer('L5_Sig2') Or ExistsOnLayer('L6_Sig3') Or ExistsOnLayer('L8_Sig4'))] p200: gap=0.02 ignorepadtopadclearanceinfootprint=FALSE except(0.254: Hole-Hole) sourcerule=512 cellrowname=POWER_SUPPLY cellrowtype=2 cellcolname=All cellcoltype=0 innerlayers=TRUE
Clearance Clearance_2 [InNetClass('POWER_SUPPLY') And (ExistsOnLayer('L1_Top') Or ExistsOnLayer('L8_Bottom')) vs (ExistsOnLayer('L1_Top') Or ExistsOnLayer('L8_Bottom'))] p201: gap=0.02 ignorepadtopadclearanceinfootprint=FALSE except(0.254: Hole-Hole) sourcerule=512 cellrowname=POWER_SUPPLY cellrowtype=2 cellcolname=All cellcoltype=0 outerlayers=TRUE
Clearance Clearance_3 [InNetClass('POWER_SUPPLY')] p202: gap=0.254 ignorepadtopadclearanceinfootprint=FALSE sourcerule=512 cellrowname=POWER_SUPPLY cellrowtype=2 cellcolname=All cellcoltype=0
Clearance Clearance_1 [InNetClass('POWER_SUPPLY') And (ExistsOnLayer('L3_Sig1') Or ExistsOnLayer('L5_Sig2') Or ExistsOnLayer('L6_Sig3') Or ExistsOnLayer('L8_Sig4')) vs InNetClass('CPU_SIGNAL') And (ExistsOnLayer('L3_Sig1') Or ExistsOnLayer('L5_Sig2') Or ExistsOnLayer('L6_Sig3') Or ExistsOnLayer('L8_Sig4'))] p203: gap=0.02 ignorepadtopadclearanceinfootprint=FALSE except(0.254: Hole-Hole) sourcerule=512 cellrowname=POWER_SUPPLY cellrowtype=2 cellcolname=CPU_SIGNAL cellcoltype=2 innerlayers=TRUE
Clearance Clearance_2 [InNetClass('POWER_SUPPLY') And (ExistsOnLayer('L1_Top') Or ExistsOnLayer('L8_Bottom')) vs InNetClass('CPU_SIGNAL') And (ExistsOnLayer('L1_Top') Or ExistsOnLayer('L8_Bottom'))] p204: gap=0.02 ignorepadtopadclearanceinfootprint=FALSE except(0.254: Hole-Hole) sourcerule=512 cellrowname=POWER_SUPPLY cellrowtype=2 cellcolname=CPU_SIGNAL cellcoltype=2 outerlayers=TRUE
Clearance Clearance_3 [InNetClass('POWER_SUPPLY') vs InNetClass('CPU_SIGNAL')] p205: gap=0.254 ignorepadtopadclearanceinfootprint=FALSE sourcerule=512 cellrowname=POWER_SUPPLY cellrowtype=2 cellcolname=CPU_SIGNAL cellcoltype=2
Clearance Clearance_1 [InNetClass('POWER_SUPPLY') And (ExistsOnLayer('L3_Sig1') Or ExistsOnLayer('L5_Sig2') Or ExistsOnLayer('L6_Sig3') Or ExistsOnLayer('L8_Sig4')) vs InNetClass('CSI_HIGH_SPEED') And (ExistsOnLayer('L3_Sig1') Or ExistsOnLayer('L5_Sig2') Or ExistsOnLayer('L6_Sig3') Or ExistsOnLayer('L8_Sig4'))] p206: gap=0.02 ignorepadtopadclearanceinfootprint=FALSE except(0.254: Hole-Hole) sourcerule=512 cellrowname=POWER_SUPPLY cellrowtype=2 cellcolname=CSI_HIGH_SPEED cellcoltype=2 innerlayers=TRUE
Clearance Clearance_2 [InNetClass('POWER_SUPPLY') And (ExistsOnLayer('L1_Top') Or ExistsOnLayer('L8_Bottom')) vs InNetClass('CSI_HIGH_SPEED') And (ExistsOnLayer('L1_Top') Or ExistsOnLayer('L8_Bottom'))] p207: gap=0.02 ignorepadtopadclearanceinfootprint=FALSE except(0.254: Hole-Hole) sourcerule=512 cellrowname=POWER_SUPPLY cellrowtype=2 cellcolname=CSI_HIGH_SPEED cellcoltype=2 outerlayers=TRUE
Clearance Clearance_3 [InNetClass('POWER_SUPPLY') vs InNetClass('CSI_HIGH_SPEED')] p208: gap=0.254 ignorepadtopadclearanceinfootprint=FALSE sourcerule=512 cellrowname=POWER_SUPPLY cellrowtype=2 cellcolname=CSI_HIGH_SPEED cellcoltype=2
Clearance Clearance_1 [InNetClass('POWER_SUPPLY') And (ExistsOnLayer('L3_Sig1') Or ExistsOnLayer('L5_Sig2') Or ExistsOnLayer('L6_Sig3') Or ExistsOnLayer('L8_Sig4')) vs InNetClass('DDR1_HIGH_SPEED') And (ExistsOnLayer('L3_Sig1') Or ExistsOnLayer('L5_Sig2') Or ExistsOnLayer('L6_Sig3') Or ExistsOnLayer('L8_Sig4'))] p209: gap=0.02 ignorepadtopadclearanceinfootprint=FALSE except(0.089: Hole-Hole) sourcerule=512 cellrowname=POWER_SUPPLY cellrowtype=2 cellcolname=DDR1_HIGH_SPEED cellcoltype=2 innerlayers=TRUE
Clearance Clearance_2 [InNetClass('POWER_SUPPLY') And (ExistsOnLayer('L1_Top') Or ExistsOnLayer('L8_Bottom')) vs InNetClass('DDR1_HIGH_SPEED') And (ExistsOnLayer('L1_Top') Or ExistsOnLayer('L8_Bottom'))] p210: gap=0.02 ignorepadtopadclearanceinfootprint=FALSE except(0.089: Hole-Hole) sourcerule=512 cellrowname=POWER_SUPPLY cellrowtype=2 cellcolname=DDR1_HIGH_SPEED cellcoltype=2 outerlayers=TRUE
Clearance Clearance_3 [InNetClass('POWER_SUPPLY') vs InNetClass('DDR1_HIGH_SPEED')] p211: gap=0.254 ignorepadtopadclearanceinfootprint=FALSE sourcerule=512 cellrowname=POWER_SUPPLY cellrowtype=2 cellcolname=DDR1_HIGH_SPEED cellcoltype=2
Clearance Clearance_1 [InNetClass('POWER_SUPPLY') And (ExistsOnLayer('L3_Sig1') Or ExistsOnLayer('L5_Sig2') Or ExistsOnLayer('L6_Sig3') Or ExistsOnLayer('L8_Sig4')) vs InNetClass('EMMC_HIGH_SPEED') And (ExistsOnLayer('L3_Sig1') Or ExistsOnLayer('L5_Sig2') Or ExistsOnLayer('L6_Sig3') Or ExistsOnLayer('L8_Sig4'))] p212: gap=0.02 ignorepadtopadclearanceinfootprint=FALSE except(0.254: Hole-Hole) sourcerule=512 cellrowname=POWER_SUPPLY cellrowtype=2 cellcolname=EMMC_HIGH_SPEED cellcoltype=2 innerlayers=TRUE
Clearance Clearance_2 [InNetClass('POWER_SUPPLY') And (ExistsOnLayer('L1_Top') Or ExistsOnLayer('L8_Bottom')) vs InNetClass('EMMC_HIGH_SPEED') And (ExistsOnLayer('L1_Top') Or ExistsOnLayer('L8_Bottom'))] p213: gap=0.02 ignorepadtopadclearanceinfootprint=FALSE except(0.254: Hole-Hole) sourcerule=512 cellrowname=POWER_SUPPLY cellrowtype=2 cellcolname=EMMC_HIGH_SPEED cellcoltype=2 outerlayers=TRUE
Clearance Clearance_3 [InNetClass('POWER_SUPPLY') vs InNetClass('EMMC_HIGH_SPEED')] p214: gap=0.254 ignorepadtopadclearanceinfootprint=FALSE sourcerule=512 cellrowname=POWER_SUPPLY cellrowtype=2 cellcolname=EMMC_HIGH_SPEED cellcoltype=2
Clearance Clearance_1 [InNetClass('POWER_SUPPLY') And (ExistsOnLayer('L3_Sig1') Or ExistsOnLayer('L5_Sig2') Or ExistsOnLayer('L6_Sig3') Or ExistsOnLayer('L8_Sig4')) vs InNetClass('I2S_PROTOCOL') And (ExistsOnLayer('L3_Sig1') Or ExistsOnLayer('L5_Sig2') Or ExistsOnLayer('L6_Sig3') Or ExistsOnLayer('L8_Sig4'))] p215: gap=0.02 ignorepadtopadclearanceinfootprint=FALSE except(0.254: Hole-Hole) sourcerule=512 cellrowname=POWER_SUPPLY cellrowtype=2 cellcolname=I2S_PROTOCOL cellcoltype=2 innerlayers=TRUE
Clearance Clearance_2 [InNetClass('POWER_SUPPLY') And (ExistsOnLayer('L1_Top') Or ExistsOnLayer('L8_Bottom')) vs InNetClass('I2S_PROTOCOL') And (ExistsOnLayer('L1_Top') Or ExistsOnLayer('L8_Bottom'))] p216: gap=0.02 ignorepadtopadclearanceinfootprint=FALSE except(0.254: Hole-Hole) sourcerule=512 cellrowname=POWER_SUPPLY cellrowtype=2 cellcolname=I2S_PROTOCOL cellcoltype=2 outerlayers=TRUE
Clearance Clearance_3 [InNetClass('POWER_SUPPLY') vs InNetClass('I2S_PROTOCOL')] p217: gap=0.254 ignorepadtopadclearanceinfootprint=FALSE sourcerule=512 cellrowname=POWER_SUPPLY cellrowtype=2 cellcolname=I2S_PROTOCOL cellcoltype=2
Clearance Clearance_1 [InNetClass('POWER_SUPPLY') And (ExistsOnLayer('L3_Sig1') Or ExistsOnLayer('L5_Sig2') Or ExistsOnLayer('L6_Sig3') Or ExistsOnLayer('L8_Sig4')) vs InNetClass('MCU_SIGNAL') And (ExistsOnLayer('L3_Sig1') Or ExistsOnLayer('L5_Sig2') Or ExistsOnLayer('L6_Sig3') Or ExistsOnLayer('L8_Sig4'))] p218: gap=0.02 ignorepadtopadclearanceinfootprint=FALSE except(0.254: Hole-Hole) sourcerule=512 cellrowname=POWER_SUPPLY cellrowtype=2 cellcolname=MCU_SIGNAL cellcoltype=2 innerlayers=TRUE
Clearance Clearance_2 [InNetClass('POWER_SUPPLY') And (ExistsOnLayer('L1_Top') Or ExistsOnLayer('L8_Bottom')) vs InNetClass('MCU_SIGNAL') And (ExistsOnLayer('L1_Top') Or ExistsOnLayer('L8_Bottom'))] p219: gap=0.02 ignorepadtopadclearanceinfootprint=FALSE except(0.254: Hole-Hole) sourcerule=512 cellrowname=POWER_SUPPLY cellrowtype=2 cellcolname=MCU_SIGNAL cellcoltype=2 outerlayers=TRUE
Clearance Clearance_3 [InNetClass('POWER_SUPPLY') vs InNetClass('MCU_SIGNAL')] p220: gap=0.254 ignorepadtopadclearanceinfootprint=FALSE sourcerule=512 cellrowname=POWER_SUPPLY cellrowtype=2 cellcolname=MCU_SIGNAL cellcoltype=2
Clearance Clearance_1 [InNetClass('POWER_SUPPLY') And (ExistsOnLayer('L3_Sig1') Or ExistsOnLayer('L5_Sig2') Or ExistsOnLayer('L6_Sig3') Or ExistsOnLayer('L8_Sig4')) vs InNetClass('MIPI_HIGH_SPEED') And (ExistsOnLayer('L3_Sig1') Or ExistsOnLayer('L5_Sig2') Or ExistsOnLayer('L6_Sig3') Or ExistsOnLayer('L8_Sig4'))] p221: gap=0.02 ignorepadtopadclearanceinfootprint=FALSE except(0.254: Hole-Hole) sourcerule=512 cellrowname=POWER_SUPPLY cellrowtype=2 cellcolname=MIPI_HIGH_SPEED cellcoltype=2 innerlayers=TRUE
Clearance Clearance_2 [InNetClass('POWER_SUPPLY') And (ExistsOnLayer('L1_Top') Or ExistsOnLayer('L8_Bottom')) vs InNetClass('MIPI_HIGH_SPEED') And (ExistsOnLayer('L1_Top') Or ExistsOnLayer('L8_Bottom'))] p222: gap=0.02 ignorepadtopadclearanceinfootprint=FALSE except(0.254: Hole-Hole) sourcerule=512 cellrowname=POWER_SUPPLY cellrowtype=2 cellcolname=MIPI_HIGH_SPEED cellcoltype=2 outerlayers=TRUE
Clearance Clearance_3 [InNetClass('POWER_SUPPLY') vs InNetClass('MIPI_HIGH_SPEED')] p223: gap=0.254 ignorepadtopadclearanceinfootprint=FALSE sourcerule=512 cellrowname=POWER_SUPPLY cellrowtype=2 cellcolname=MIPI_HIGH_SPEED cellcoltype=2
Clearance Clearance_1 [InNetClass('POWER_SUPPLY') And (ExistsOnLayer('L3_Sig1') Or ExistsOnLayer('L5_Sig2') Or ExistsOnLayer('L6_Sig3') Or ExistsOnLayer('L8_Sig4')) vs InNetClass('PERIPHERICS_SIGNALS') And (ExistsOnLayer('L3_Sig1') Or ExistsOnLayer('L5_Sig2') Or ExistsOnLayer('L6_Sig3') Or ExistsOnLayer('L8_Sig4'))] p224: gap=0.02 ignorepadtopadclearanceinfootprint=FALSE except(0.254: Hole-Hole) sourcerule=512 cellrowname=POWER_SUPPLY cellrowtype=2 cellcolname=PERIPHERICS_SIGNALS cellcoltype=2 innerlayers=TRUE
Clearance Clearance_2 [InNetClass('POWER_SUPPLY') And (ExistsOnLayer('L1_Top') Or ExistsOnLayer('L8_Bottom')) vs InNetClass('PERIPHERICS_SIGNALS') And (ExistsOnLayer('L1_Top') Or ExistsOnLayer('L8_Bottom'))] p225: gap=0.02 ignorepadtopadclearanceinfootprint=FALSE except(0.254: Hole-Hole) sourcerule=512 cellrowname=POWER_SUPPLY cellrowtype=2 cellcolname=PERIPHERICS_SIGNALS cellcoltype=2 outerlayers=TRUE
Clearance Clearance_3 [InNetClass('POWER_SUPPLY') vs InNetClass('PERIPHERICS_SIGNALS')] p226: gap=0.254 ignorepadtopadclearanceinfootprint=FALSE sourcerule=512 cellrowname=POWER_SUPPLY cellrowtype=2 cellcolname=PERIPHERICS_SIGNALS cellcoltype=2
Clearance Clearance_1 [InNetClass('POWER_SUPPLY') And (ExistsOnLayer('L3_Sig1') Or ExistsOnLayer('L5_Sig2') Or ExistsOnLayer('L6_Sig3') Or ExistsOnLayer('L8_Sig4')) vs InNetClass('POWER_SIGNALS') And (ExistsOnLayer('L3_Sig1') Or ExistsOnLayer('L5_Sig2') Or ExistsOnLayer('L6_Sig3') Or ExistsOnLayer('L8_Sig4'))] p227: gap=0.02 ignorepadtopadclearanceinfootprint=FALSE except(0.254: Hole-Hole) sourcerule=512 cellrowname=POWER_SUPPLY cellrowtype=2 cellcolname=POWER_SIGNALS cellcoltype=2 innerlayers=TRUE
Clearance Clearance_2 [InNetClass('POWER_SUPPLY') And (ExistsOnLayer('L1_Top') Or ExistsOnLayer('L8_Bottom')) vs InNetClass('POWER_SIGNALS') And (ExistsOnLayer('L1_Top') Or ExistsOnLayer('L8_Bottom'))] p228: gap=0.02 ignorepadtopadclearanceinfootprint=FALSE except(0.254: Hole-Hole) sourcerule=512 cellrowname=POWER_SUPPLY cellrowtype=2 cellcolname=POWER_SIGNALS cellcoltype=2 outerlayers=TRUE
Clearance Clearance_3 [InNetClass('POWER_SUPPLY') vs InNetClass('POWER_SIGNALS')] p229: gap=0.254 ignorepadtopadclearanceinfootprint=FALSE sourcerule=512 cellrowname=POWER_SUPPLY cellrowtype=2 cellcolname=POWER_SIGNALS cellcoltype=2
Clearance Clearance_1 [InNetClass('POWER_SUPPLY') And (ExistsOnLayer('L3_Sig1') Or ExistsOnLayer('L5_Sig2') Or ExistsOnLayer('L6_Sig3') Or ExistsOnLayer('L8_Sig4')) vs InNetClass('POWER_SUPPLY') And (ExistsOnLayer('L3_Sig1') Or ExistsOnLayer('L5_Sig2') Or ExistsOnLayer('L6_Sig3') Or ExistsOnLayer('L8_Sig4'))] p230: gap=0.02 ignorepadtopadclearanceinfootprint=FALSE except(0.254: Hole-Hole) sourcerule=512 cellrowname=POWER_SUPPLY cellrowtype=2 cellcolname=POWER_SUPPLY cellcoltype=2 innerlayers=TRUE
Clearance Clearance_2 [InNetClass('POWER_SUPPLY') And (ExistsOnLayer('L1_Top') Or ExistsOnLayer('L8_Bottom')) vs InNetClass('POWER_SUPPLY') And (ExistsOnLayer('L1_Top') Or ExistsOnLayer('L8_Bottom'))] p231: gap=0.02 ignorepadtopadclearanceinfootprint=FALSE except(0.254: Hole-Hole) sourcerule=512 cellrowname=POWER_SUPPLY cellrowtype=2 cellcolname=POWER_SUPPLY cellcoltype=2 outerlayers=TRUE
Clearance Clearance_3 [InNetClass('POWER_SUPPLY') vs InNetClass('POWER_SUPPLY')] p232: gap=0.254 ignorepadtopadclearanceinfootprint=FALSE sourcerule=512 cellrowname=POWER_SUPPLY cellrowtype=2 cellcolname=POWER_SUPPLY cellcoltype=2
Clearance Clearance_1 [InNetClass('PULL_DOWN_UP_RESISTENCE') And (ExistsOnLayer('L3_Sig1') Or ExistsOnLayer('L5_Sig2') Or ExistsOnLayer('L6_Sig3') Or ExistsOnLayer('L8_Sig4')) vs InNetClass('ANTENAS') And (ExistsOnLayer('L3_Sig1') Or ExistsOnLayer('L5_Sig2') Or ExistsOnLayer('L6_Sig3') Or ExistsOnLayer('L8_Sig4'))] p233: gap=0.02 ignorepadtopadclearanceinfootprint=FALSE except(0.05: Hole-Hole) sourcerule=512 cellrowname=PULL_DOWN_UP_RESISTENCE cellrowtype=2 cellcolname=ANTENAS cellcoltype=2 innerlayers=TRUE
Clearance Clearance_2 [InNetClass('PULL_DOWN_UP_RESISTENCE') And (ExistsOnLayer('L1_Top') Or ExistsOnLayer('L8_Bottom')) vs InNetClass('ANTENAS') And (ExistsOnLayer('L1_Top') Or ExistsOnLayer('L8_Bottom'))] p234: gap=0.02 ignorepadtopadclearanceinfootprint=FALSE except(0.05: Hole-Hole) sourcerule=512 cellrowname=PULL_DOWN_UP_RESISTENCE cellrowtype=2 cellcolname=ANTENAS cellcoltype=2 outerlayers=TRUE
Clearance Clearance_3 [InNetClass('PULL_DOWN_UP_RESISTENCE') vs InNetClass('ANTENAS')] p235: gap=0.254 ignorepadtopadclearanceinfootprint=FALSE sourcerule=512 cellrowname=PULL_DOWN_UP_RESISTENCE cellrowtype=2 cellcolname=ANTENAS cellcoltype=2
Clearance Clearance_1 [InNetClass('PULL_DOWN_UP_RESISTENCE') And (ExistsOnLayer('L3_Sig1') Or ExistsOnLayer('L5_Sig2') Or ExistsOnLayer('L6_Sig3') Or ExistsOnLayer('L8_Sig4')) vs (ExistsOnLayer('L3_Sig1') Or ExistsOnLayer('L5_Sig2') Or ExistsOnLayer('L6_Sig3') Or ExistsOnLayer('L8_Sig4'))] p236: gap=0.02 ignorepadtopadclearanceinfootprint=FALSE except(0.254: Hole-Hole) sourcerule=512 cellrowname=PULL_DOWN_UP_RESISTENCE cellrowtype=2 cellcolname=All cellcoltype=0 innerlayers=TRUE
Clearance Clearance_2 [InNetClass('PULL_DOWN_UP_RESISTENCE') And (ExistsOnLayer('L1_Top') Or ExistsOnLayer('L8_Bottom')) vs (ExistsOnLayer('L1_Top') Or ExistsOnLayer('L8_Bottom'))] p237: gap=0.02 ignorepadtopadclearanceinfootprint=FALSE except(0.254: Hole-Hole) sourcerule=512 cellrowname=PULL_DOWN_UP_RESISTENCE cellrowtype=2 cellcolname=All cellcoltype=0 outerlayers=TRUE
Clearance Clearance_3 [InNetClass('PULL_DOWN_UP_RESISTENCE')] p238: gap=0.254 ignorepadtopadclearanceinfootprint=FALSE sourcerule=512 cellrowname=PULL_DOWN_UP_RESISTENCE cellrowtype=2 cellcolname=All cellcoltype=0
Clearance Clearance_1 [InNetClass('PULL_DOWN_UP_RESISTENCE') And (ExistsOnLayer('L3_Sig1') Or ExistsOnLayer('L5_Sig2') Or ExistsOnLayer('L6_Sig3') Or ExistsOnLayer('L8_Sig4')) vs InNetClass('CPU_SIGNAL') And (ExistsOnLayer('L3_Sig1') Or ExistsOnLayer('L5_Sig2') Or ExistsOnLayer('L6_Sig3') Or ExistsOnLayer('L8_Sig4'))] p239: gap=0.02 ignorepadtopadclearanceinfootprint=FALSE except(0.254: Hole-Hole) sourcerule=512 cellrowname=PULL_DOWN_UP_RESISTENCE cellrowtype=2 cellcolname=CPU_SIGNAL cellcoltype=2 innerlayers=TRUE
Clearance Clearance_2 [InNetClass('PULL_DOWN_UP_RESISTENCE') And (ExistsOnLayer('L1_Top') Or ExistsOnLayer('L8_Bottom')) vs InNetClass('CPU_SIGNAL') And (ExistsOnLayer('L1_Top') Or ExistsOnLayer('L8_Bottom'))] p240: gap=0.02 ignorepadtopadclearanceinfootprint=FALSE except(0.254: Hole-Hole) sourcerule=512 cellrowname=PULL_DOWN_UP_RESISTENCE cellrowtype=2 cellcolname=CPU_SIGNAL cellcoltype=2 outerlayers=TRUE
Clearance Clearance_3 [InNetClass('PULL_DOWN_UP_RESISTENCE') vs InNetClass('CPU_SIGNAL')] p241: gap=0.254 ignorepadtopadclearanceinfootprint=FALSE sourcerule=512 cellrowname=PULL_DOWN_UP_RESISTENCE cellrowtype=2 cellcolname=CPU_SIGNAL cellcoltype=2
Clearance Clearance_1 [InNetClass('PULL_DOWN_UP_RESISTENCE') And (ExistsOnLayer('L3_Sig1') Or ExistsOnLayer('L5_Sig2') Or ExistsOnLayer('L6_Sig3') Or ExistsOnLayer('L8_Sig4')) vs InNetClass('CSI_HIGH_SPEED') And (ExistsOnLayer('L3_Sig1') Or ExistsOnLayer('L5_Sig2') Or ExistsOnLayer('L6_Sig3') Or ExistsOnLayer('L8_Sig4'))] p242: gap=0.02 ignorepadtopadclearanceinfootprint=FALSE except(0.254: Hole-Hole) sourcerule=512 cellrowname=PULL_DOWN_UP_RESISTENCE cellrowtype=2 cellcolname=CSI_HIGH_SPEED cellcoltype=2 innerlayers=TRUE
Clearance Clearance_2 [InNetClass('PULL_DOWN_UP_RESISTENCE') And (ExistsOnLayer('L1_Top') Or ExistsOnLayer('L8_Bottom')) vs InNetClass('CSI_HIGH_SPEED') And (ExistsOnLayer('L1_Top') Or ExistsOnLayer('L8_Bottom'))] p243: gap=0.02 ignorepadtopadclearanceinfootprint=FALSE except(0.254: Hole-Hole) sourcerule=512 cellrowname=PULL_DOWN_UP_RESISTENCE cellrowtype=2 cellcolname=CSI_HIGH_SPEED cellcoltype=2 outerlayers=TRUE
Clearance Clearance_3 [InNetClass('PULL_DOWN_UP_RESISTENCE') vs InNetClass('CSI_HIGH_SPEED')] p244: gap=0.254 ignorepadtopadclearanceinfootprint=FALSE sourcerule=512 cellrowname=PULL_DOWN_UP_RESISTENCE cellrowtype=2 cellcolname=CSI_HIGH_SPEED cellcoltype=2
Clearance Clearance_1 [InNetClass('PULL_DOWN_UP_RESISTENCE') And (ExistsOnLayer('L3_Sig1') Or ExistsOnLayer('L5_Sig2') Or ExistsOnLayer('L6_Sig3') Or ExistsOnLayer('L8_Sig4')) vs InNetClass('DDR1_HIGH_SPEED') And (ExistsOnLayer('L3_Sig1') Or ExistsOnLayer('L5_Sig2') Or ExistsOnLayer('L6_Sig3') Or ExistsOnLayer('L8_Sig4'))] p245: gap=0.02 ignorepadtopadclearanceinfootprint=FALSE except(0.089: Hole-Hole) sourcerule=512 cellrowname=PULL_DOWN_UP_RESISTENCE cellrowtype=2 cellcolname=DDR1_HIGH_SPEED cellcoltype=2 innerlayers=TRUE
Clearance Clearance_2 [InNetClass('PULL_DOWN_UP_RESISTENCE') And (ExistsOnLayer('L1_Top') Or ExistsOnLayer('L8_Bottom')) vs InNetClass('DDR1_HIGH_SPEED') And (ExistsOnLayer('L1_Top') Or ExistsOnLayer('L8_Bottom'))] p246: gap=0.02 ignorepadtopadclearanceinfootprint=FALSE except(0.089: Hole-Hole) sourcerule=512 cellrowname=PULL_DOWN_UP_RESISTENCE cellrowtype=2 cellcolname=DDR1_HIGH_SPEED cellcoltype=2 outerlayers=TRUE
Clearance Clearance_3 [InNetClass('PULL_DOWN_UP_RESISTENCE') vs InNetClass('DDR1_HIGH_SPEED')] p247: gap=0.254 ignorepadtopadclearanceinfootprint=FALSE sourcerule=512 cellrowname=PULL_DOWN_UP_RESISTENCE cellrowtype=2 cellcolname=DDR1_HIGH_SPEED cellcoltype=2
Clearance Clearance_1 [InNetClass('PULL_DOWN_UP_RESISTENCE') And (ExistsOnLayer('L3_Sig1') Or ExistsOnLayer('L5_Sig2') Or ExistsOnLayer('L6_Sig3') Or ExistsOnLayer('L8_Sig4')) vs InNetClass('EMMC_HIGH_SPEED') And (ExistsOnLayer('L3_Sig1') Or ExistsOnLayer('L5_Sig2') Or ExistsOnLayer('L6_Sig3') Or ExistsOnLayer('L8_Sig4'))] p248: gap=0.02 ignorepadtopadclearanceinfootprint=FALSE except(0.254: Hole-Hole) sourcerule=512 cellrowname=PULL_DOWN_UP_RESISTENCE cellrowtype=2 cellcolname=EMMC_HIGH_SPEED cellcoltype=2 innerlayers=TRUE
Clearance Clearance_2 [InNetClass('PULL_DOWN_UP_RESISTENCE') And (ExistsOnLayer('L1_Top') Or ExistsOnLayer('L8_Bottom')) vs InNetClass('EMMC_HIGH_SPEED') And (ExistsOnLayer('L1_Top') Or ExistsOnLayer('L8_Bottom'))] p249: gap=0.02 ignorepadtopadclearanceinfootprint=FALSE except(0.254: Hole-Hole) sourcerule=512 cellrowname=PULL_DOWN_UP_RESISTENCE cellrowtype=2 cellcolname=EMMC_HIGH_SPEED cellcoltype=2 outerlayers=TRUE
Clearance Clearance_3 [InNetClass('PULL_DOWN_UP_RESISTENCE') vs InNetClass('EMMC_HIGH_SPEED')] p250: gap=0.254 ignorepadtopadclearanceinfootprint=FALSE sourcerule=512 cellrowname=PULL_DOWN_UP_RESISTENCE cellrowtype=2 cellcolname=EMMC_HIGH_SPEED cellcoltype=2
Clearance Clearance_1 [InNetClass('PULL_DOWN_UP_RESISTENCE') And (ExistsOnLayer('L3_Sig1') Or ExistsOnLayer('L5_Sig2') Or ExistsOnLayer('L6_Sig3') Or ExistsOnLayer('L8_Sig4')) vs InNetClass('I2S_PROTOCOL') And (ExistsOnLayer('L3_Sig1') Or ExistsOnLayer('L5_Sig2') Or ExistsOnLayer('L6_Sig3') Or ExistsOnLayer('L8_Sig4'))] p251: gap=0.02 ignorepadtopadclearanceinfootprint=FALSE except(0.254: Hole-Hole) sourcerule=512 cellrowname=PULL_DOWN_UP_RESISTENCE cellrowtype=2 cellcolname=I2S_PROTOCOL cellcoltype=2 innerlayers=TRUE
Clearance Clearance_2 [InNetClass('PULL_DOWN_UP_RESISTENCE') And (ExistsOnLayer('L1_Top') Or ExistsOnLayer('L8_Bottom')) vs InNetClass('I2S_PROTOCOL') And (ExistsOnLayer('L1_Top') Or ExistsOnLayer('L8_Bottom'))] p252: gap=0.02 ignorepadtopadclearanceinfootprint=FALSE except(0.254: Hole-Hole) sourcerule=512 cellrowname=PULL_DOWN_UP_RESISTENCE cellrowtype=2 cellcolname=I2S_PROTOCOL cellcoltype=2 outerlayers=TRUE
Clearance Clearance_3 [InNetClass('PULL_DOWN_UP_RESISTENCE') vs InNetClass('I2S_PROTOCOL')] p253: gap=0.254 ignorepadtopadclearanceinfootprint=FALSE sourcerule=512 cellrowname=PULL_DOWN_UP_RESISTENCE cellrowtype=2 cellcolname=I2S_PROTOCOL cellcoltype=2